# EAGLE board AQ_sensor_GSM (EAGLE 9.6.2), part 1 of 2
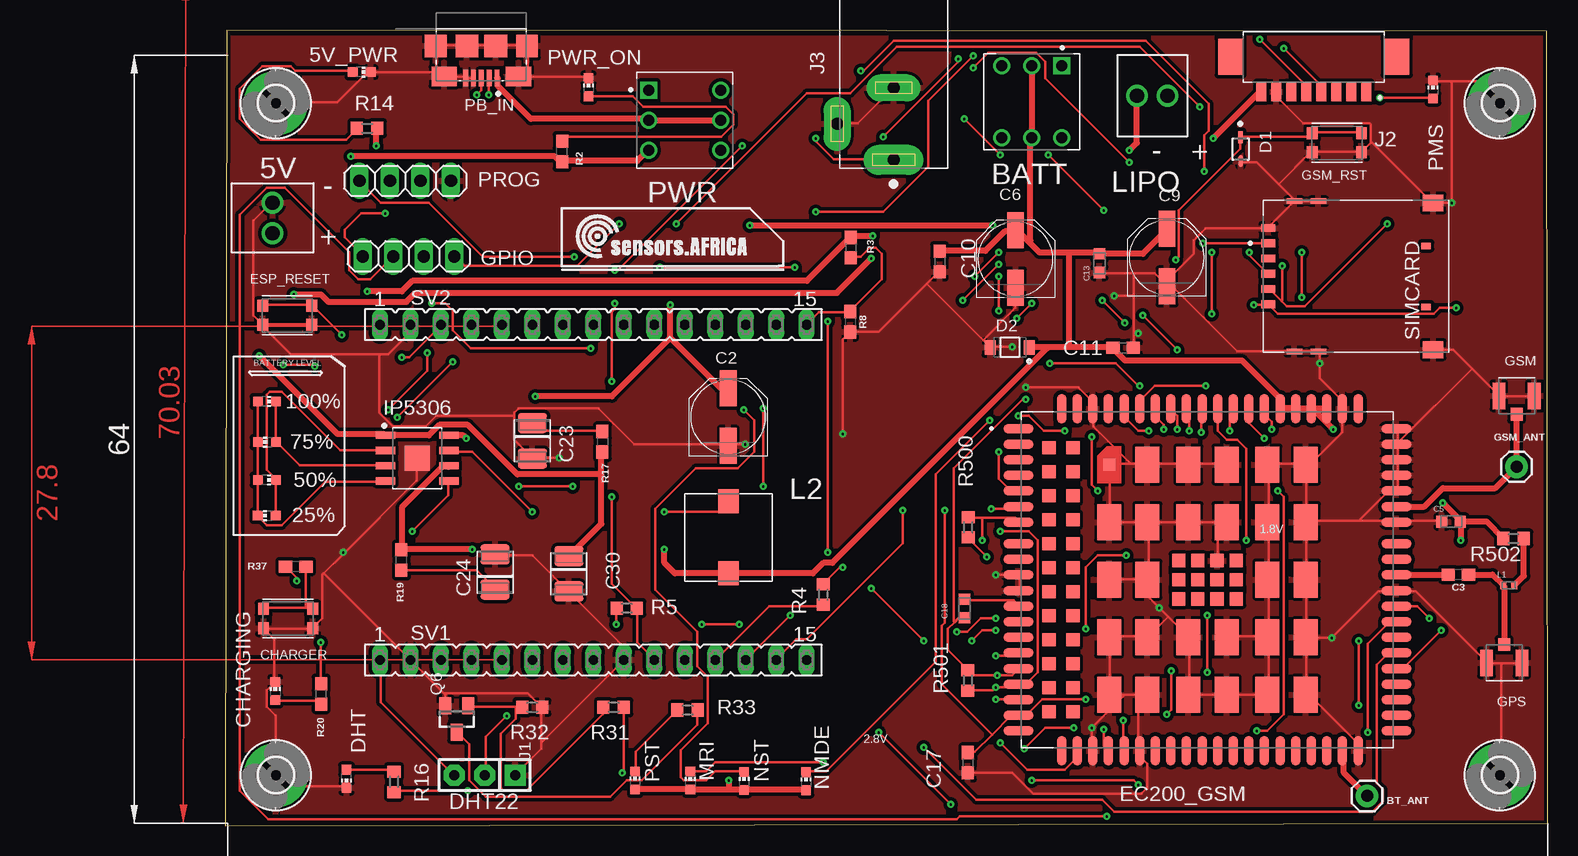
[diagram p0: board, top side]
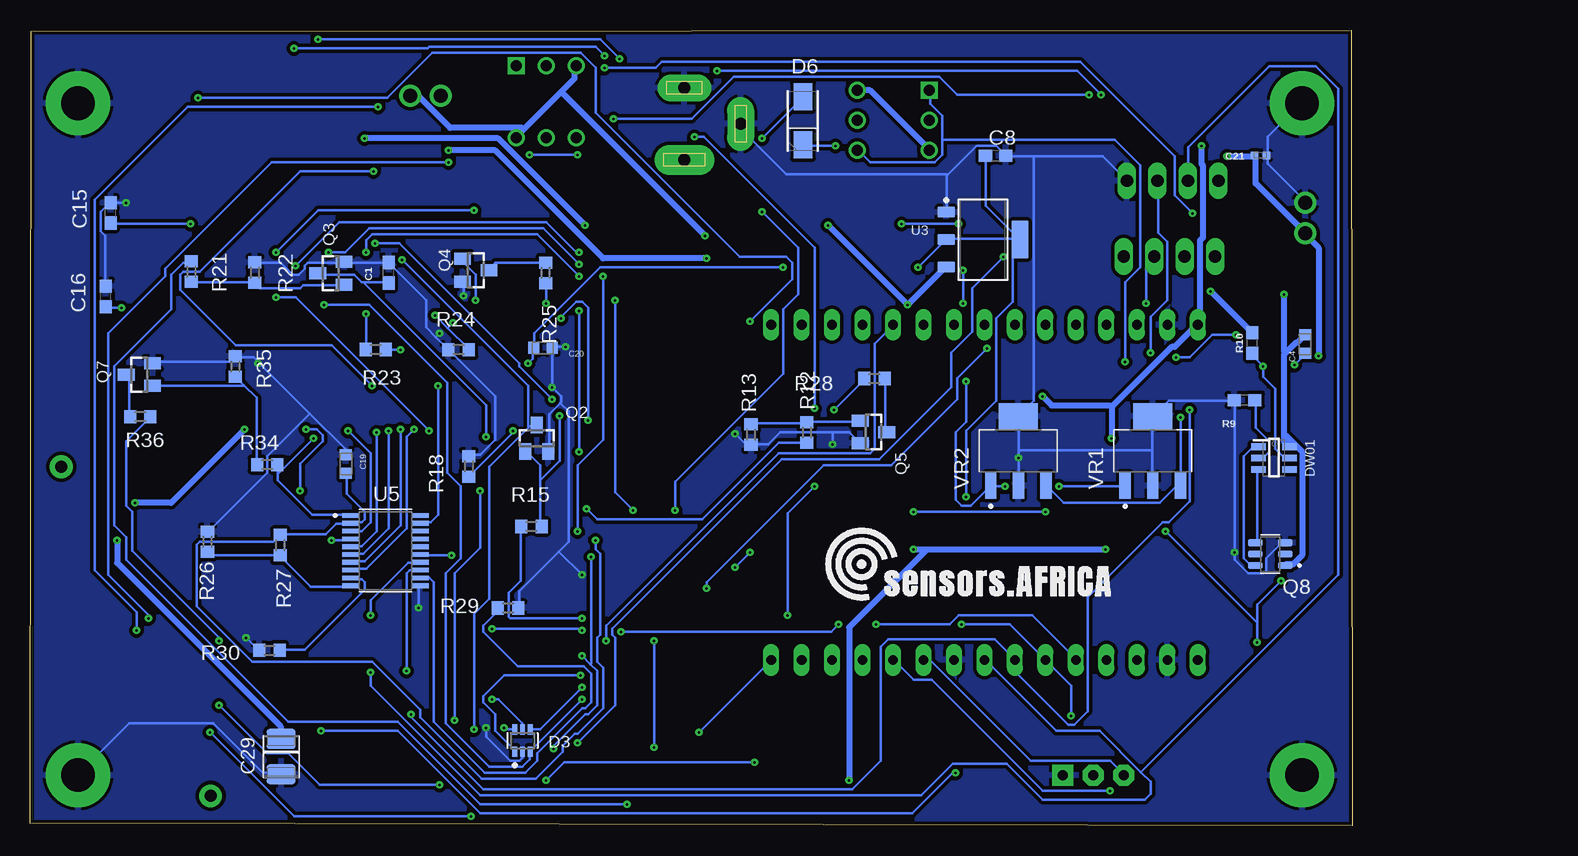
[diagram p1: board, bottom side, seen from below]

Size 110.2 x 66.3 mm. Coordinates in mm from the lower left corner, seen from the top.
Outline: 110.1,66.2 0.1,66.3 0,0 110.2,0.2 110.1,66.2
Copper layers (1*16): Top 0.035mm / dielectric 1.5mm / Bottom 0.035mm
Design rules "default *": minimum track width 0.1mm, minimum drill 0.15mm, track to track 0.3mm, track to pad 0.1mm, pad to pad 0.2mm, via to via 0.3mm, smd to smd 0.3mm, copper to edge 0.3mm, drill to drill 0.3mm, minimum pad ring 10mil, minimum via ring 8mil, stop-mask expansion 4mil, vias tented up to drill 0mil, thermal gap 10mil
Net classes: 0 default: width 0.2 mm, drill 0.2 mm, clearance 0.2 mm; 1 POWER: width 0.2 mm, drill 0.2 mm, clearance 0.2 mm to class 0, clearance 0.2 mm; 2 BGA: width 0.2 mm, drill 0.2 mm; 3 HCurrent: width 0.5 mm, drill 0.2 mm, clearance 0.2 mm to class 0

## Footprints (pad centres in the part's own frame; a part is rotated, then mirrored left to right if it is on the bottom)
TERMBLK_254-2N = drill 1.2: 1 0,0; 2 2.54,0
CHIP-LED0603 = smd 0.8 x 0.8: A 0,-0.75; C 0,0.75
SW_TL2285EE = drill 0.9 square: 1 -2.5,-3 | drill 0.9: 2 0,-3; 3 2.5,-3; 4 -2.5,3; 5 0,3; 6 2.5,3
1X01 = drill 1.016 pad 1.88: 1 0,0
0603 = smd 1.1 x 1: 1 -0.85,0; 2 0.85,0
PANASONIC_D = smd 3 x 1.4: + 2.4,0; - -2.4,0
CAPC1608X90N = smd 0.92 x 0.98: 1 -0.775,0; 2 0.775,0
C0603 = smd 1.1 x 1: 1 -0.85,0; 2 0.85,0
0402-TIGHT = smd 0.6 x 0.6: 1 -0.5,0; 2 0.5,0
CAP_TANT_B = smd 1.66 x 2.42: 1 -1.475,0; 2 1.475,0
SW_KMR621NGLFS = smd 0.9 x 1: 1_1 -2.05,0.8; 1_2 2.05,0.8; 2_1 -2.05,-0.8; 2_2 2.05,-0.8
ON_SEMI_1N4148WS_0 = smd 1.006 x 0.392: 1 -1,0; 2 1,0
ON_SEMICONDUCTOR_MMSZ5231BT1G_0 = smd 0.91 x 1.22: 1 -1.635,0; 2 1.635,0
SEMTECH_SMF05C_0 = smd 0.85 x 0.4: 1 -0.925,0.65; 2 -0.925,0; 3 -0.925,-0.65; 4 0.925,-0.65; 5 0.925,0; 6 0.925,0.65
DIOM5025X220N = smd 2.25 x 1.55: 1 -2,0; 2 2,0
SOT23-6L = smd 0.55 x 1.2: 1 -0.95,-1.3; 2 0,-1.3; 3 0.95,-1.3; 4 0.95,1.3; 5 0,1.3; 6 -0.95,1.3
XCVR_EC200UCNAB-N05-SNNSA = smd 2.5 x 0.8: 1 -15.75,12.6; 2 -15.75,11.3; 3 -15.75,10; 4 -15.75,8.7; 5 -15.75,7.4; 6 -15.75,6.1; 7 -15.75,4.8; 8 -15.75,0.4; 9 -15.75,-0.9; 10 -15.75,-2.2; 11 -15.75,-3.5; 12 -15.75,-4.8; 13 -15.75,-6.1; 14 -15.75,-7.4; 15 -15.75,-8.7; 16 -15.75,-10; 17 -15.75,-11.3; 18 -15.75,-12.6; 37 15.75,-12.6; 38 15.75,-11.3; 39 15.75,-10; 40 15.75,-8.7; 41 15.75,-7.4; 42 15.75,-6.1; 43 15.75,-4.8; 44 15.75,-3.5; 45 15.75,-2.2; 46 15.75,-0.9; 47 15.75,0.4; 48 15.75,4.8; 49 15.75,6.1; 50 15.75,7.4; 51 15.75,8.7; 52 15.75,10; 53 15.75,11.3; 54 15.75,12.6; 141 -15.75,3; 142 -15.75,1.7; 143 15.75,1.7; 144 15.75,3 | smd 0.8 x 2.5: 19 -9.55,-14.25; 20 -8.25,-14.25; 21 -6.95,-14.25; 22 -5.65,-14.25; 23 -4.35,-14.25; 24 -3.05,-14.25; 25 -1.75,-14.25; 26 -0.45,-14.25; 27 0.85,-14.25; 28 2.15,-14.25; 29 3.45,-14.25; 30 4.75,-14.25; 31 6.05,-14.25; 32 7.35,-14.25; 33 8.65,-14.25; 34 9.95,-14.25; 35 11.25,-14.25; 36 12.55,-14.25; 55 12.55,14.25; 56 11.25,14.25; 57 9.95,14.25; 58 8.65,14.25; 59 7.35,14.25; 60 6.05,14.25; 61 4.75,14.25; 62 3.45,14.25; 63 2.15,14.25; 64 0.85,14.25; 65 -0.45,14.25; 66 -1.75,14.25; 67 -3.05,14.25; 68 -4.35,14.25; 69 -5.65,14.25; 70 -6.95,14.25; 71 -8.25,14.25; 72 -9.55,14.25; 113 -10.85,14.25; 114 -12.15,14.25; 115 -10.85,-14.25; 116 -12.15,-14.25 | smd 1.1 x 1.1: 73 2.4,1.6; 74 2.4,0; 75 2.4,-1.6; 76 0.8,1.6; 77 0.8,0; 78 0.8,-1.6; 79 -0.8,1.6; 80 -0.8,0; 81 -0.8,-1.6; 82 -2.4,1.6; 83 -2.4,0; 84 -2.4,-1.6; 117 -11.2,11; 118 -11.2,9; 119 -11.2,7; 120 -11.2,5; 121 -11.2,3; 122 -11.2,1; 123 -11.2,-1; 124 -11.2,-3; 125 -11.2,-5; 126 -11.2,-7; 127 -11.2,-9; 128 -11.2,-11; 129 -13.2,11; 130 -13.2,9; 131 -13.2,7; 132 -13.2,5; 133 -13.2,3; 134 -13.2,1; 135 -13.2,-1; 136 -13.2,-3; 137 -13.2,-5; 138 -13.2,-7; 139 -13.2,-9; 140 -13.2,-11 | smd 2 x 3: 85 8.2,9.6; 86 8.2,4.8; 87 8.2,0; 88 8.2,-4.8; 89 8.2,-9.6; 90 5,9.6; 91 5,4.8; 92 5,0; 93 5,-4.8; 94 5,-9.6; 95 1.6,9.6; 96 1.6,4.8; 97 1.6,-4.8; 98 1.6,-9.6; 99 -1.6,9.6; 100 -1.6,4.8; 101 -1.6,-4.8; 102 -1.6,-9.6; 103 -5,9.6; 104 -5,4.8; 105 -5,0; 106 -5,-4.8; 107 -5,-9.6; 109 -8.2,4.8; 110 -8.2,0; 111 -8.2,-4.8; 112 -8.2,-9.6 | smd 1 x 1: 108 -8.2,9.6
1X04 = drill 1.016 long: 1 -3.81,0; 2 -1.27,0; 3 1.27,0; 4 3.81,0
TE_1909763-1 = smd 1 x 1.05: 1 0,-1.525 | smd 1.05 x 2.2: 2 -1.475,0; 3 1.475,0
2,8-PAD = drill 2.8 pad 5.334: B2,8 0,0
SOIC127P600X165-9T209N = smd 1.609 x 0.594: 1 -2.653,1.905; 2 -2.653,0.635; 3 -2.653,-0.635; 4 -2.653,-1.905; 5 2.653,-1.905; 6 2.653,-0.635; 7 2.653,0.635; 8 2.653,1.905 | smd 2.09 x 2.09: 9 0,0
SIP-100-03-32 = drill 0.813 pad 1.778 square: 1 -2.54,0 | drill 0.813 pad 1.778 octagon: 2 0,0; 3 2.54,0
MOLEX_53261-0871 = smd 0.8 x 1.6: 1 -4.375,2.9; 2 -3.125,2.9; 3 -1.875,2.9; 4 -0.625,2.9; 5 0.625,2.9; 6 1.875,2.9; 7 3.125,2.9; 8 4.375,2.9 | smd 2.1 x 3: S1 -6.925,0; S2 6.925,0
CUI_PJ-002BH = drill 1 pad 2.5 long: 1 0,0 | drill 1 pad 2.25 long: 2 6,0; 3 3,4.7
INDC1005X60N = smd 0.51 x 0.63: 1 -0.46,0; 2 0.46,0
784778010 = smd 1.7 x 2: 1 0,3; 2 0,-3
AMPHENOL_10118192-0001LF = smd 0.4 x 1.35: 1 -1.3,0; 2 -0.65,0; 3 0,0; 4 0.65,0; 5 1.3,0 | smd 2.1 x 1.6: SH1 -3.1,-0.125; SH2 3.1,-0.125 | smd 1.8 x 1.9: SH3 -3.8,-2.675; SH6 3.8,-2.675 | smd 1.9 x 1.9: SH4 -1.2,-2.675; SH5 1.2,-2.675
SOT23-BEC = smd 1 x 1.4: B -0.95,-1.1; C 0,1.1; E 0.95,-1.1
SOT95P280X145-6N = smd 1.21 x 0.59: 1 -1.255,0.95; 2 -1.255,0; 3 -1.255,-0.95; 4 1.255,-0.95; 5 1.255,0; 6 1.255,0.95
R0603 = smd 1 x 1.1: 1 -0.85,0; 2 0.85,0
MOLEX_78646-3001 = smd 1.15 x 0.65: C1 -7.295,2.755; C2 -7.295,0.215; C3 -7.295,-2.325; C5 -7.295,4.025; C6 -7.295,1.485; C7 -7.295,-1.055 | smd 1.3 x 0.45: G1 -5.125,6.27; G2 -3.125,6.27; G3 -5.125,-6.27; G4 -3.125,-6.27 | smd 1.7 x 1.4: G5 6.435,-6.105; G6 6.435,6.105 | smd 0.8 x 0.54: X1 5.855,2.54; X2 5.855,-2.54
FE15 = drill 0.813 long: 1 -17.78,0; 2 -15.24,0; 3 -12.7,0; 4 -10.16,0; 5 -7.62,0; 6 -5.08,0; 7 -2.54,0; 8 0,0; 9 2.54,0; 10 5.08,0; 11 7.62,0; 12 10.16,0; 13 12.7,0; 14 15.24,0; 15 17.78,0
TEXAS_INSTRUMENTS_LM1117IMP-3.3-NOPB_0 = smd 1.45 x 0.9: 1 -3.075,2.3; 2 -3.075,0; 3 -3.075,-2.3 | smd 1.45 x 3.15: 4 3.075,0
SOP65P640X120-20N = smd 1.57 x 0.41: 1 -2.87,2.925; 2 -2.87,2.275; 3 -2.87,1.625; 4 -2.87,0.975; 5 -2.87,0.325; 6 -2.87,-0.325; 7 -2.87,-0.975; 8 -2.87,-1.625; 9 -2.87,-2.275; 10 -2.87,-2.925; 11 2.87,-2.925; 12 2.87,-2.275; 13 2.87,-1.625; 14 2.87,-0.975; 15 2.87,-0.325; 16 2.87,0.325; 17 2.87,0.975; 18 2.87,1.625; 19 2.87,2.275; 20 2.87,2.925
VREG_LM7805MPX/NOPB = smd 2.15 x 0.95: 1 -2.9,2.3; 2 -2.9,0; 3 -2.9,-2.3 | smd 2.15 x 3.25: 4 2.9,0

## Placement (x,y rotation side)
5V  2828XX-2282834-2  [TERMBLK_254-2N]  3.93,49.37 90 top
5V_PWR  RED  [CHIP-LED0603]  11.35,62.79 270 top
25%  ORANGE  [CHIP-LED0603]  3.44,25.83 90 top
50%  ORANGE  [CHIP-LED0603]  3.46,28.8 270 top
75%  ORANGE  [CHIP-LED0603]  3.46,31.96 90 top
100%  ORANGE  [CHIP-LED0603]  3.46,35.34 270 top
BATT  TL2285EE  [SW_TL2285EE]  67.19,60.31 180 top
BT_ANT  [1X01]  95.14,2.48 180 top
C1  10nF  [0603]  80.32,46.07 90 bottom
C2  100uF  [PANASONIC_D]  41.9,34.05 90 top
C3  100pF  [0603]  102.74,20.92 180 top
C4  100nf  [CAPC1608X90N]  3.94,40.12 90 bottom
C5  100nf  [CAPC1608X90N]  102.14,25.32 0 top
C6  100uF  [PANASONIC_D]  65.84,47.22 90 top
C8  10uF  [C0603]  29.73,55.84 0 bottom
C9  100uF  [PANASONIC_D]  78.46,47.34 90 top
C10  33pF  [C0603]  59.51,47.01 270 top
C11  10pF  [C0603]  74.8,39.81 0 top
C13  100nf  [CAPC1608X90N]  72.83,46.87 90 top
C15  33pF  [C0603]  103.49,51.07 90 bottom
C16  33pF  [C0603]  103.87,44.09 90 bottom
C17  33pF  [C0603]  61.86,5.25 270 top
C18  100nf  [CAPC1608X90N]  61.58,18.09 270 top
C19  100nf  [CAPC1608X90N]  83.88,30.13 270 bottom
C20  100nf  [CAPC1608X90N]  67.46,39.81 180 bottom
C21  22pF  [0402-TIGHT]  7.66,55.85 0 bottom
C23  TAJB106K016RNJ  [CAP_TANT_B]  25.58,32.06 270 top
C24  TAJB106K016RNJ  [CAP_TANT_B]  22.47,21.13 90 top
C29  TAJB106K016RNJ  [CAP_TANT_B]  89.27,5.75 270 bottom
C30  TAJB106K016RNJ  [CAP_TANT_B]  28.61,20.99 270 top
CHARGER  KMR621NGLFS  [SW_KMR621NGLFS]  5.22,17.26 0 top
CHARGING  ORANGE  [CHIP-LED0603]  4.14,11.22 0 top
D1  ON_SEMI_1N4148WSON_SEMI_1N4148WS_0_0  [ON_SEMI_1N4148WS_0]  84.59,56.37 270 top
D2  ON_SEMICONDUCTOR_MMSZ5231BT1GON_SEMICONDUCTOR_MMSZ5231BT1G_0_0  [ON_SEMICONDUCTOR_MMSZ5231BT1G_0]  65.36,39.84 180 top
D3  SEMTECH_SMF05CSEMTECH_SMF05C_0_0  [SEMTECH_SMF05C_0]  69.15,7.08 90 bottom
D6  SS54-HF  [DIOM5025X220N]  45.79,58.72 90 bottom
DHT  GREEN  [CHIP-LED0603]  10.09,3.9 180 top
DW01  DW01-P  [SOT23-6L]  6.54,30.62 270 bottom
EC200_GSM  EC200UCNAB-N05-SNNSA  [XCVR_EC200UCNAB-N05-SNNSA]  81.83,20.49 0 top
ESP_RESET  KMR621NGLFS  [SW_KMR621NGLFS]  5.14,42.52 180 top
GPIO  PINHD-1X4  [1X04]  15.25,47.43 0 top
GPS  1909763-1  [TE_1909763-1]  106.56,13.56 180 top
GSM  1909763-1  [TE_1909763-1]  107.59,35.81 0 top
GSM_ANT  [1X01]  107.59,29.9 180 top
GSM_RST  KMR621NGLFS  [SW_KMR621NGLFS]  92.61,56.9 180 top
H1  MOUNT-PAD-ROUND2.8  [2,8-PAD]  4.2,60.2 180 top
H2  MOUNT-PAD-ROUND2.8  [2,8-PAD]  4.2,4.2 180 top
H3  MOUNT-PAD-ROUND2.8  [2,8-PAD]  106.2,4.2 180 top
H4  MOUNT-PAD-ROUND2.8  [2,8-PAD]  106.2,60.2 180 top
IP5306  IP5306  [SOIC127P600X165-9T209N]  15.97,30.62 0 top
J1  F-1X03-SIP-100-32  [SIP-100-03-32]  21.6,4.2 180 top
J2  53261-0871  [MOLEX_53261-0871]  90.69,64.06 180 top
J3  PJ-002BH  [CUI_PJ-002BH]  55.68,55.47 90 top
L1  LQW15AN47NG00D  [INDC1005X60N]  106.94,20.02 0 top
L2  784778010  [784778010]  41.91,24.02 0 top
LIPO  2828XX-2282834-2  [TERMBLK_254-2N]  78.51,60.82 180 top
MRI  ORANGE  [CHIP-LED0603]  38.73,3.75 0 top
NMDE  ORANGE  [CHIP-LED0603]  48.37,3.69 0 top
NST  ORANGE  [CHIP-LED0603]  43.22,3.73 0 top
PB_IN  10118192-0001LF  [AMPHENOL_10118192-0001LF]  21.32,62.3 180 top
PMS  ORANGE  [CHIP-LED0603]  100.63,61.35 0 top
PROG  PINHD-1X4  [1X04]  14.98,53.74 0 top
PST  ORANGE  [CHIP-LED0603]  34.13,3.76 0 top
PWR  TL2285EE  [SW_TL2285EE]  38.27,58.79 270 top
PWR_ON  ORANGE  [CHIP-LED0603]  30.25,61.53 0 top
Q2  MMBT2222  [SOT23-BEC]  67.98,32.28 0 bottom
Q3  MMBT2222  [SOT23-BEC]  85.13,46.02 90 bottom
Q4  MMBT2222  [SOT23-BEC]  73.05,46.29 270 bottom
Q5  MMBT2222  [SOT23-BEC]  39.91,32.8 270 bottom
Q6  MMBT2222  [SOT23-BEC]  19.27,8.88 180 top
Q7  MMBT2222  [SOT23-BEC]  101.09,37.58 90 bottom
Q8  FS8205  [SOT95P280X145-6N]  6.84,22.62 180 bottom
R2  1k  [0603]  28.04,56.17 90 top
R3  47k  [0603]  52.1,48.17 270 top
R4  470R  [R0603]  49.81,19.24 270 top
R5  4.7K  [R0603]  33.44,18.12 180 top
R8  10k  [0603]  52.05,41.99 270 top
R9  1k  [0603]  8.99,35.45 180 bottom
R10  100R  [0603]  8.34,40.22 90 bottom
R12  4.7K  [R0603]  45.46,32.76 90 bottom
R13  47K  [R0603]  50.11,32.59 90 bottom
R14  1K  [R0603]  11.8,58.11 0 top
R15  4.7K  [R0603]  68.42,24.93 0 bottom
R16  470R  [R0603]  14.05,3.65 270 top
R17  2R  [0603]  31.4,31.99 270 top
R18  47K  [R0603]  73.63,29.94 270 bottom
R19  2R  [0603]  14.66,22.13 90 top
R20  220R  [0603]  7.98,10.97 90 top
R21  4.7K  [R0603]  96.76,46.16 270 bottom
R22  47K  [R0603]  91.46,46.08 270 bottom
R23  4.7K  [R0603]  81.39,39.68 0 bottom
R24  47K  [R0603]  74.48,39.66 0 bottom
R25  470R  [R0603]  67.23,46.06 270 bottom
R26  120K  [R0603]  95.41,23.66 90 bottom
R27  10K  [R0603]  89.35,23.37 270 bottom
R28  470R  [R0603]  39.84,37.26 180 bottom
R29  51K  [R0603]  70.35,18.13 0 bottom
R30  51K  [R0603]  90.24,14.61 180 bottom
R31  4.7K  [R0603]  32.34,9.86 180 top
R32  47K  [R0603]  25.56,9.86 180 top
R33  470R  [R0603]  38.51,9.63 180 top
R34  4.7K  [R0603]  90.43,30.08 180 bottom
R35  47K  [R0603]  93.09,38.26 270 bottom
R36  470R  [R0603]  101.02,34.07 0 bottom
R37  10k  [0603]  5.86,21.59 180 top
R500  4.7K  [R0603]  61.89,24.86 90 top
R501  4.7K  [R0603]  61.87,12.09 90 top
R502  10R  [R0603]  107.34,23.92 180 top
SIMCARD  78646-3001  [MOLEX_78646-3001]  94.2,45.77 0 top
SV1  [FE15]  30.66,13.8 0 top
SV2  [FE15]  30.66,41.74 0 top
U3  TEXAS_INSTRUMENTS_LM1117IMP-3.3-NOPBTEXAS_INSTRUMENTS_LM1117IMP-3.3-NOPB_0_0  [TEXAS_INSTRUMENTS_LM1117IMP-3.3-NOPB_0]  30.77,48.83 0 bottom
U5  TXS0108EPWR  [SOP65P640X120-20N]  80.58,22.92 0 bottom
VR1  LM7805MPX/NOPB  [VREG_LM7805MPX/NOPB]  16.64,31.22 90 bottom
VR2  LM7805MPX/NOPB  [VREG_LM7805MPX/NOPB]  27.84,31.22 90 bottom

## Library data of the parts
5V LIPO = Connector; CATEGORY: Fixed Terminal Blocks; DESCRIPTION: Fixed Terminal Blocks 2P SIDE ENTRY 2.54mm; MANUFACTURER: TE Connectivity AMP Connectors; MPN: 282834-2; OPERATING_TEMPERATURE: -40°C ~ 105°C; PART_STATUS: Active; PITCH: 0.100" (2.54mm); ROHS_COMPLIANCE: RoHS Compliant; SERIES: Buchanan; SUBCATEGORY: Terminal Blocks; TYPE: Through Hole; Screw - Rising Cage Clamp; Side wire entry, Horizontal with Board
5V_PWR 25% 50% 75% 100% CHARGING DHT MRI NMDE NST PMS PST PWR_ON = led
BATT PWR = TL2285EE; AVAILABILITY: In Stock; CHECK_PRICES: https://www.snapeda.com/parts/TL2285EE/E-Switch/view-part/?ref=eda; DESCRIPTION: Pushbutton Switch DPDT Standard Through Hole; MF: E-Switch; MP: TL2285EE; PACKAGE: None; PRICE: None; PURCHASE-URL: https://www.snapeda.com/api/url_track_click_mouser/?unipart_id=653295&manufacturer=E-Switch&part_name=TL2285EE&search_term= latching straight dpdt switch; SNAPEDA_LINK: https://www.snapeda.com/parts/TL2285EE/E-Switch/view-part/?ref=snap
BT_ANT GSM_ANT = SparkFun-Connectors
C1 = SparkFun-Capacitors; PROD_ID: CAP-00867
C2 C6 C8-C11 C15-C17 = rcl; SPICEPREFIX: C
C3 = SparkFun-Capacitors; PROD_ID: CAP-07883
C4 C5 C13 C18-C20 = 06035C104K4T2A; AVAILABILITY: In Stock; CHECK_PRICES: https://www.snapeda.com/parts/06035C104K4T2A/AVX+%252F+Kyocera/view-part/?ref=eda; DESCRIPTION: Capacitor MLCC 0603 100nF 50V | AVX 06035C104K4T2A; MF: AVX; MP: 06035C104K4T2A; PACKAGE: 1608 AVX; PRICE: None; SNAPEDA_LINK: https://www.snapeda.com/parts/06035C104K4T2A/AVX+%252F+Kyocera/view-part/?ref=snap
C21 = SparkFun-Capacitors; PROD_ID: CAP-15725
C23 C24 C29 C30 = Resistor_Capacitor; CREATED_BY: PCBLayout.com; DIGIKEY_PART_NUMBER: 478-1673-2-ND; MANUFACTURER: AVX Corporation; MPN: TAJB106K016RNJ; PACKAGE: CAP TANT B
CHARGER ESP_RESET GSM_RST = AQ_sensor_GSM; AVAILABILITY: Unavailable; DESCRIPTION: Tactile Switch SPST-NO Top Actuated Surface Mount; MF: C&K; MP: KMR621NG LFS; PACKAGE: None; PRICE: None
D1 = AQ_sensor_GSM; CENTROID_NOT_SPECIFIED: No; DATASHEET: https://www.fairchildsemi.com/datasheets/1N/1N4148WS.pdf; DIGIKEY_DESCRIPTION: DIODE GEN PURP 75V 150MA SOD323F; DIGIKEY_PART_NUMBER: 1N4148WSFSCT-ND; IPC_LAND_PATTERN_NAME: SOD250125X70-2; LEAD_FREE: yes; MF: ON Semi; MFG_PACKAGE_IDENT: CASE 477AB; MOUSER_DESCRIPTION: Diodes - General Purpose, Power, Switching Small Signal Diode; MOUSER_PART_NUMBER: 512-1N4148WS; MPN: 1N4148WS; PACKAGE: SOD-323FL; PREFIX: D; ROHS: yes; TEMPERATURE_RANGE_HIGH: +150°C
D2 = AQ_sensor_GSM; CIIVA_IDS: 804101; COMPONENT_LINK_1_DESCRIPTION: Manufacturer URL; COMPONENT_LINK_1_URL: http://www.onsemi.com/; COMPONENT_LINK_3_DESCRIPTION: Package Specification; COMPONENT_LINK_3_URL: http://www.onsemi.com/pub_link/Collateral/425-04.PDF; DATASHEET: http://www.onsemi.com/pub_link/Collateral/MMSZ5221BT1-D.PDF; DATASHEET_VERSION: Rev. 12; FOOTPRINT_VARIANT_NAME_0: Manufacturer Recommended; IMPORTED: yes; IMPORTED_FROM: vault; IMPORT_TS: 1521844429; MF: On Semiconductor; MOUNTING_TECHNOLOGY: Surface Mount; MPN: MMSZ5231BT1G; PACKAGE: SOD-123-2-425-04; PACKAGE_DESCRIPTION: 2-Pin SOD, Body 1.6 x 2.69 mm; PACKAGE_VERSION: Rev. G, 10/2009; PACKING: Tape and Reel; PREFIX: D; P_MAX_W: 0.5; RELEASE_DATE: 1407150685; ROHS: No; VAULT_GUID: 27F6BF34-1EB2-4973-A1B4-1410F52D084D; VAULT_REVISION: BBBB861B-93F7-43FE-93E6-D586C34E6C45; VZ_TYP_V: 5.1
D3 = AQ_sensor_GSM; CENTROID_NOT_SPECIFIED: No; DATASHEET: http://www.semtech.com/images/datasheet/smf05c.pdf; DIGIKEY_DESCRIPTION: DIODE TVS DIODE 5VWM 12.5VC SC70-6; DIGIKEY_PART_NUMBER: SMF05CCT-ND; JUNCTION_CAPACITANCE: 130pF max; LEAD_FREE: yes; MANUFACTURER_PRODUCT_PAGE: http://www.semtech.com/apps/product.php?pn=SMF05C; MF: Semtech; MFG_PACKAGE_IDENT: SC70-6L; MOUSER_PART_NUMBER: 947-SMF05C.TCT; MPN: SMF05C; PACKAGE: SC-70-6; PREFIX: D; REVERSE_STAND-OFF_VOLTAGE: 5V; ROHS: yes; TEMPERATURE_RANGE_HIGH: +125°C; TEMPERATURE_RANGE_LOW: -55°C
D6 = SS54-HF schottkey Diode; AVAILABILITY: In Stock; CHECK_PRICES: https://www.snapeda.com/parts/SS54-HF/Comchip+Technology/view-part/?ref=eda; DESCRIPTION: Diode Schottky 40 V 5A Surface Mount DO-214AC (SMA); MF: Comchip Technology; MP: SS54-HF; PACKAGE: DO-214AC-214 Comchip Technology; PRICE: None; PURCHASE-URL: https://www.snapeda.com/api/url_track_click_mouser/?unipart_id=5812679&manufacturer=Comchip Technology&part_name=SS54-HF&search_term=ss54; SNAPEDA_LINK: https://www.snapeda.com/parts/SS54-HF/Comchip+Technology/view-part/?ref=snap
DW01 = DW01-P; AVAILABILITY: In Stock; CHECK_PRICES: https://www.snapeda.com/parts/DW01-P/Fortune+Semiconductor/view-part/?ref=eda; DESCRIPTION: One Cell Lithium-ion/Polymer Battery Protection IC; MF: Fortune; MP: DW01-P; PACKAGE: None; PRICE: None; SNAPEDA_LINK: https://www.snapeda.com/parts/DW01-P/Fortune+Semiconductor/view-part/?ref=snap
EC200_GSM = EC200UCNAB-N05-SNNSA; AVAILABILITY: In Stock; CHECK_PRICES: https://www.snapeda.com/parts/EC200UCNAB-N05-SNNSA/Quectel/view-part/?ref=eda; DESCRIPTION: Quectel Wireless Solutions External Passive, 1559-1606, GNSS L1, Spiral, -, SMA Male (center pin), Terminal, 50 oe10; MF: Quectel; MP: EC200UCNAB-N05-SNNSA; PACKAGE: None; PRICE: None; SNAPEDA_LINK: https://www.snapeda.com/parts/EC200UCNAB-N05-SNNSA/Quectel/view-part/?ref=snap
GPIO PROG = Connector; CATEGORY: Headers; DESCRIPTION: Header, Straight, 4 Position; MANUFACTURER: Generic; MPN: Generic; OPERATING_TEMPERATURE: Generic; PART_STATUS: Active; PITCH: 0.100" (2.54mm); ROHS_COMPLIANCE: Generic; SERIES: Generic; SUB-CATEGORY: Headers, Male Pins; TYPE: Board to Board or Cable, Unshrouded, Through Hole, Straight
GPS GSM = 1909763-1; AVAILABILITY: In Stock; CHECK_PRICES: https://www.snapeda.com/parts/1909763-1/TE+Connectivity+AMP+Connectors/view-part/?ref=eda; COMMENT: 1909763-1; DESCRIPTION: U.FL (UMCC) Connector Jack, Male Pin 50 Ohms Surface Mount Solder; MF: TE Connectivity; MP: 1909763-1; PACKAGE: None; PRICE: None; PURCHASE-URL: https://www.snapeda.com/api/url_track_click_mouser/?unipart_id=380488&manufacturer=TE Connectivity&part_name=1909763-1&search_term=1909763; SNAPEDA_LINK: https://www.snapeda.com/parts/1909763-1/TE+Connectivity+AMP+Connectors/view-part/?ref=snap
H1-H4 J1 = AQ_sensor_GSM
IP5306 = IP5306
J2 = 53261-0871; AVAILABILITY: In Stock; CHECK_PRICES: https://www.snapeda.com/parts/53261-0871/Molex/view-part/?ref=eda; DESCRIPTION: Conn; Rect/PCB; Header; 1.25mm Pitch; W2B; 8 Pos; PicoBlade; SMT; Rt Ang; Tin | Molex Incorporated 53261-0871; MF: Molex; MP: 53261-0871; PACKAGE: None; PRICE: None; SNAPEDA_LINK: https://www.snapeda.com/parts/53261-0871/Molex/view-part/?ref=snap
J3 = PJ-002BH; AVAILABILITY: In Stock; CHECK_PRICES: https://www.snapeda.com/parts/PJ-002BH/CUI+Devices/view-part/?ref=eda; CUI_PURCHASE_URL: https://www.cuidevices.com/product/interconnect/connectors/dc-power-connectors/jacks/pj-002bh?utm_source=snapeda.com&utm_medium=referral&utm_campaign=snapedaBOM; DESCRIPTION: 2.5 x 6.5 mm, 5.0 A, Horizontal, Through Hole, Dc Power Jack Connector; MF: CUI Devices; MP: PJ-002BH; PACKAGE: None; PRICE: None; PURCHASE-URL: https://www.snapeda.com/api/url_track_click_mouser/?unipart_id=329039&manufacturer=CUI Devices&part_name=PJ-002BH&search_term=dc power jack; SNAPEDA_LINK: https://www.snapeda.com/parts/PJ-002BH/CUI+Devices/view-part/?ref=snap
L1 = LQW15AN47NG00D 47uh; AVAILABILITY: In Stock; CHECK_PRICES: https://www.snapeda.com/parts/LQW15AN47NG00D/Murata+Electronics+North+America/view-part/?ref=eda; DESCRIPTION: Inductor with Inductance: 47nH Tol. +/-2%, Package: 0402 (1005); MF: Murata; MP: LQW15AN47NG00D; PACKAGE: 1005 Murata; PRICE: None; PURCHASE-URL: https://www.snapeda.com/api/url_track_click_mouser/?unipart_id=1499500&manufacturer=Murata&part_name=LQW15AN47NG00D&search_term=lqw15an47ng00d; SNAPEDA_LINK: https://www.snapeda.com/parts/LQW15AN47NG00D/Murata+Electronics+North+America/view-part/?ref=snap
L2 = Fixed Inductors; CREATED_BY: PCBLayout.com; DIGIKEY_PART_NUMBER: 732-6740-2-ND; MANUFACTURER: Wurth Electronics Inc.; MPN: 784778010; PACKAGE: 7332
PB_IN = AQ_sensor_GSM; AVAILABILITY: Unavailable; DESCRIPTION: USB - micro B USB 2.0 Receptacle Connector 5 Position Surface Mount, Right Angle; MF: Amphenol ICC; MP: 10118192-0001LF; PACKAGE: None; PRICE: None
Q2-Q7 = MMBT2222_; AVAILABILITY: In Stock; CHECK_PRICES: https://www.snapeda.com/parts/MMBT2222/Onsemi/view-part/?ref=eda; DESCRIPTION: Bipolar (BJT) Transistor NPN 30 V 600 mA 250MHz 300 mW Surface Mount SOT-23-3 (TO-236); MF: ON Semiconductor; MP: MMBT2222; PACKAGE: SOT-23-3 Fairchild Semiconductor; PRICE: None; SNAPEDA_LINK: https://www.snapeda.com/parts/MMBT2222/Onsemi/view-part/?ref=snap
Q8 = FS8205; AVAILABILITY: In Stock; CHECK_PRICES: https://www.snapeda.com/parts/FS8205/Fortune+Semiconductor/view-part/?ref=eda; DESCRIPTION: Dual N-Channel Enhancement Mode Power MOSFET; MF: Fortune Semiconductor; MP: FS8205; PACKAGE: Package; PRICE: None; SNAPEDA_LINK: https://www.snapeda.com/parts/FS8205/Fortune+Semiconductor/view-part/?ref=snap
R2 R3 R8-R10 R17 R19 R20 R37 = SparkFun-Resistors; PROD_ID: RES-08413
R4 R5 R12-R16 R18 R21-R36 R500-R502 = rcl; SPICEPREFIX: R
SIMCARD = 78646-3001; AVAILABILITY: In Stock; CHECK_PRICES: https://www.snapeda.com/parts/78646-3001/Molex/view-part/?ref=eda; DESCRIPTION: Horizontal Surface Mount Micro SIM Card Connector, with Push In Termination | Molex Incorporated 78646-3001; MF: Molex; MP: 78646-3001; PACKAGE: None; PRICE: None; PURCHASE-URL: https://www.snapeda.com/api/url_track_click_mouser/?unipart_id=75189&manufacturer=Molex&part_name=78646-3001&search_term= 786463001; SNAPEDA_LINK: https://www.snapeda.com/parts/78646-3001/Molex/view-part/?ref=snap
SV1 SV2 = AQ_sensor_GSM; OC_FARNELL: unknown; OC_NEWARK: unknown
U3 = AQ_sensor_GSM; CIIVA_IDS: 19361124; CODE__IPC: SOT223-4; CODE__JEDEC: TO-261-AA; COMPONENT_LINK_1_DESCRIPTION: Datasheet URL; COMPONENT_LINK_1_URL: http://www.ti.com/general/docs/lit/getliterature.tsp?genericPartNumber=LM1117-N&fileType=pdf; COMP_TYPE: LDO IC; FOOTPRINT_VARIANT_NAME_0: Level C; FOOTPRINT_VARIANT_NAME_1: Level B; FOOTPRINT_VARIANT_NAME_2: Level A; HIGH__RELIABILITY: Y; IMPORTED: yes; IMPORTED_FROM: vault; IMPORT_TS: 1521845365; MF: Texas Instruments; MPN: LM1117IMP-3.3/NOPB; PACKAGE: DCY0004A; PACKAGE_DESCRIPTION: Molded SOT-223, 6.50 x 3.56 x 1.6mm Body, 4 Lead, 2.3mm Pitch; PACKAGE_TOP_MARKING: XYTT*N05B; PIN_COUNT: 4; POWER_WISE: N; PREFIX: U; RELEASE_DATE: 1464077430; ROHS: Yes; VAULT_GUID: 7E820BF6-F141-44C1-8A74-392CB201F257; VAULT_REVISION: 16019014-2FBF-4157-ADF5-B132B4DC413A
U5 = TXS0108EPWR; AVAILABILITY: In Stock; CHECK_PRICES: https://www.snapeda.com/parts/TXS0108EPWR/Texas+Instruments/view-part/?ref=eda; DESCRIPTION: 8-bit bidirectional voltage-level shifter for open-drain and push-pull application; MF: Texas Instruments; MP: TXS0108EPWR; PACKAGE: TSSOP-20 Texas Instruments; PRICE: None; PURCHASE-URL: https://www.snapeda.com/api/url_track_click_mouser/?unipart_id=105750&manufacturer=Texas Instruments&part_name=TXS0108EPWR&search_term=txs0108epwr; SNAPEDA_LINK: https://www.snapeda.com/parts/TXS0108EPWR/Texas+Instruments/view-part/?ref=snap
VR1 VR2 = LM7805MPX_NOPB; AVAILABILITY: In Stock; CHECK_PRICES: https://www.snapeda.com/parts/LM7805MPX/NOPB/Texas+Instruments/view-part/?ref=eda; DESCRIPTION: 1.5-A, 30-V, linear voltage regulator; MF: Texas Instruments; MP: LM7805MPX/NOPB; PACKAGE: SOT-223-4 Texas Instruments; PRICE: None; PURCHASE-URL: https://www.snapeda.com/api/url_track_click_mouser/?unipart_id=546225&manufacturer=Texas Instruments&part_name=LM7805MPX/NOPB&search_term= lm7805mpx; SNAPEDA_LINK: https://www.snapeda.com/parts/LM7805MPX/NOPB/Texas+Instruments/view-part/?ref=snap

## Nets
5V_IN [HCurrent]: 5V.1 C21.1 C30.1 IP5306.1 PWR.3 PWR.4 R2.1 R17.2
5V_OUT [HCurrent]: C2.+ IP5306.8 J2.8 R14.2 SV2.1 U3.3
5VT [HCurrent]: PB_IN.1 PWR.2 PWR.5
+3V3 [POWER]: C8.1 C20.2 J1.3 R5.1 SV1.1 SV1.10 U3.2 U3.4 U5.19
BATT- [HCurrent]: C4.2 DW01.6 LIPO.2 Q8.1
BMSV: R3.2 R8.1 SV2.15
BT_ANT [HCurrent]: BT_ANT.1 EC200_GSM.35
DHT_LED: R16.2 SV1.11
DHT_OUT: J1.2 R5.2 SV1.6
ESP_RST: ESP_RESET.2_1 ESP_RESET.2_2 SV2.3
G_ADC0: EC200_GSM.45 GPIO.1
G_ADC1: EC200_GSM.44 GPIO.2
G_ADC2: EC200_GSM.43
G_GPIO1: EC200_GSM.126
G_I2C_SCL: EC200_GSM.41 GPIO.4
G_I2C_SDA: EC200_GSM.42 GPIO.3
G_SPI_CLK: EC200_GSM.40
G_SPI_CS: EC200_GSM.37
G_SPI_MISO: EC200_GSM.39
G_SPI_MOSI: EC200_GSM.38
G_USB_BOOT: EC200_GSM.115 PROG.1
G_USB_D+: EC200_GSM.69 PB_IN.3
G_USB_D-: EC200_GSM.70 PB_IN.2
G_USB_VBUS: EC200_GSM.71
GND: 5V.2 5V_PWR.C C1.2 C2.- C5.1 C6.- C8.2 C9.- C10.2 C11.2 C13.1 C15.2 C16.2 C17.2 C19.1 C20.1 C21.2 C23.2 C24.2 C29.2 C30.2 CHARGER.2_1 CHARGER.2_2 CHARGING.C D1.2 D2.2 D3.2 DHT.C EC200_GSM.8 EC200_GSM.9 EC200_GSM.19 EC200_GSM.22 EC200_GSM.36 EC200_GSM.46 EC200_GSM.48 EC200_GSM.50 EC200_GSM.51 EC200_GSM.52 EC200_GSM.53 EC200_GSM.54 EC200_GSM.56 EC200_GSM.72 EC200_GSM.76 EC200_GSM.85 EC200_GSM.86 EC200_GSM.87 EC200_GSM.88 EC200_GSM.89 EC200_GSM.90 EC200_GSM.91 EC200_GSM.92 EC200_GSM.93 EC200_GSM.94 EC200_GSM.95 EC200_GSM.96 EC200_GSM.97 EC200_GSM.98 EC200_GSM.99 EC200_GSM.100 EC200_GSM.101 EC200_GSM.102 EC200_GSM.103 EC200_GSM.104 EC200_GSM.105 EC200_GSM.106 EC200_GSM.107 EC200_GSM.108 EC200_GSM.109 EC200_GSM.110 EC200_GSM.111 EC200_GSM.112 ESP_RESET.1_1 ESP_RESET.1_2 GPS.2 GPS.3 GSM.2 GSM.3 GSM_RST.1_1 GSM_RST.1_2 H1.B2,8 H2.B2,8 H3.B2,8 H4.B2,8 IP5306.9 J1.1 J2.7 J3.2 J3.3 PB_IN.4 PB_IN.5 PB_IN.SH1 PB_IN.SH2 PB_IN.SH3 PB_IN.SH4 PB_IN.SH5 PB_IN.SH6 PMS.C PROG.4 PWR_ON.C Q2.E Q3.E Q4.E Q5.E Q6.E Q7.E Q8.3 R8.2 R9.2 R13.1 R18.1 R22.1 R24.1 R26.2 R29.2 R30.2 R32.1 R35.1 SIMCARD.C5 SIMCARD.G1 SIMCARD.G2 SIMCARD.G3 SIMCARD.G4 SIMCARD.G5 SIMCARD.G6 SV1.2 SV1.9 SV2.2 U3.1 U5.11 VR1.2 VR1.4 VR2.2 VR2.4
GNSS_ANT [HCurrent]: C3.2 EC200_GSM.47
GSM_ANT [HCurrent]: EC200_GSM.49 GSM.1 GSM_ANT.1
GSM_RST [BGA]: D1.1 EC200_GSM.20 GSM_RST.2_1 GSM_RST.2_2 Q2.C
GSM_RST_O: R15.1 SV1.5
LBV [HCurrent]: BATT.3 BATT.4 LIPO.1 R3.1 R10.2
MAIN_CTS: EC200_GSM.64 U5.4
MAIN_DCD: EC200_GSM.63 U5.3
MAIN_DTR: EC200_GSM.66 U5.6
MAIN_RI [BGA]: EC200_GSM.62 R34.1 U5.1
MAIN_RTS: EC200_GSM.65 U5.5
MAIN_RXD: EC200_GSM.68 U5.8
MAIN_TXD: EC200_GSM.67 U5.7
MCU_CTS: U5.17
MCU_DCD: U5.18
MCU_DTR: SV2.11 U5.15
MCU_RI: U5.20
MCU_RTS: U5.16
MCU_RXD: PROG.2 SV1.8 U5.14
MCU_TXD: PROG.3 SV1.7 U5.13
N$1: Q2.B R15.2 R18.2
N$2: Q3.B R21.2 R22.2
N$3: L1.2 R502.1
N$4: PMS.A R4.1
N$5: EC200_GSM.128
N$7: EC200_GSM.139
N$8: EC200_GSM.136
N$9: DW01.1 Q8.6
N$10: C3.1 GPS.1 L1.1
N$13: C23.1 R17.1
N$14: 25%.C 50%.A 75%.C 100%.A IP5306.4
N$15: EC200_GSM.127
N$16: EC200_GSM.135
N$17: 25%.A 50%.C IP5306.2
N$18: 75%.A 100%.C IP5306.3
N$19: DW01.3 Q8.4
N$20: CHARGER.1_1 CHARGER.1_2 R37.1
N$21: IP5306.7 L2.1
N$22: Q5.B R12.2 R13.2
N$23: EC200_GSM.2
N$24: C24.1 R19.1
N$25: 5V_PWR.A R14.1
N$26: Q4.B R23.2 R24.2
N$27: DHT.A R16.1
N$28: Q6.B R31.2 R32.2
N$29: Q4.C R25.1
N$30: NMDE.C R25.2
N$31: R26.1 R27.2 U5.10
N$32: Q6.C R33.1
N$33: Q5.C R28.1
N$34: NST.C R28.2
N$35: PWR_ON.A R2.2
N$36: D6.1 VR1.1 VR2.1
N$37: C4.1 DW01.5 R10.1
N$38: PWR.1 PWR.6 VR1.3 VR2.3
N$39: PST.C R33.2
N$40: R30.1 U5.9
N$41: R29.1 U5.12
N$42: Q7.B R34.2 R35.2
N$43: Q7.C R36.1
N$44: MRI.C R36.2
N$45: IP5306.5 R20.2 R37.2
N$46: CHARGING.A R20.1
N$47: DW01.2 R9.1
N$61: D6.2 J3.1
NET_MODE: EC200_GSM.5 R23.1
NETSTAT [BGA]: EC200_GSM.6 R12.1
PMS_LED: R4.2 SV1.12
PMS_RX: J2.5 SV1.13
PMS_TX: J2.4 SV1.14
PWRKEY [BGA]: C1.1 EC200_GSM.21 Q3.C
PWRKEY_0: R21.1 SV1.15
PWRSTAT: EC200_GSM.61 R31.1
SDIO1_VDD: EC200_GSM.34
SIMCLK [BGA]: C16.1 D3.3 EC200_GSM.16 SIMCARD.C3
SIMDATA: C15.1 D3.4 EC200_GSM.15 R501.1 SIMCARD.C7
SIMRST: C17.1 D3.5 EC200_GSM.17 SIMCARD.C2
USIM_DET: D3.6 EC200_GSM.13 R500.1
USIM_GND: C18.1 EC200_GSM.10
USIM_VDD: C18.2 D3.1 EC200_GSM.14 R501.2 SIMCARD.C1
V_LIPO [HCurrent]: BATT.2 BATT.5 C5.2 C6.+ C9.+ C10.1 C11.1 C13.2 C29.1 D2.1 EC200_GSM.57 EC200_GSM.58 EC200_GSM.59 EC200_GSM.60 IP5306.6 L2.2 MRI.A NMDE.A NST.A PST.A R19.2 R502.2
VBAT_EN: SV2.12
VDD_EXT: C19.2 EC200_GSM.7 R27.1 R500.2 U5.2
VPP: SIMCARD.C6